# Altium PCB PCB1.PcbDoc
Units mm, origin at the board's own origin, x right, y up, seen from the top; angles counter-clockwise.
Board outline 152.4 x 101.6 mm, 2 copper layers (Top Layer, Bottom Layer); 16 components, 11 nets, 42 pads, 6 vias.
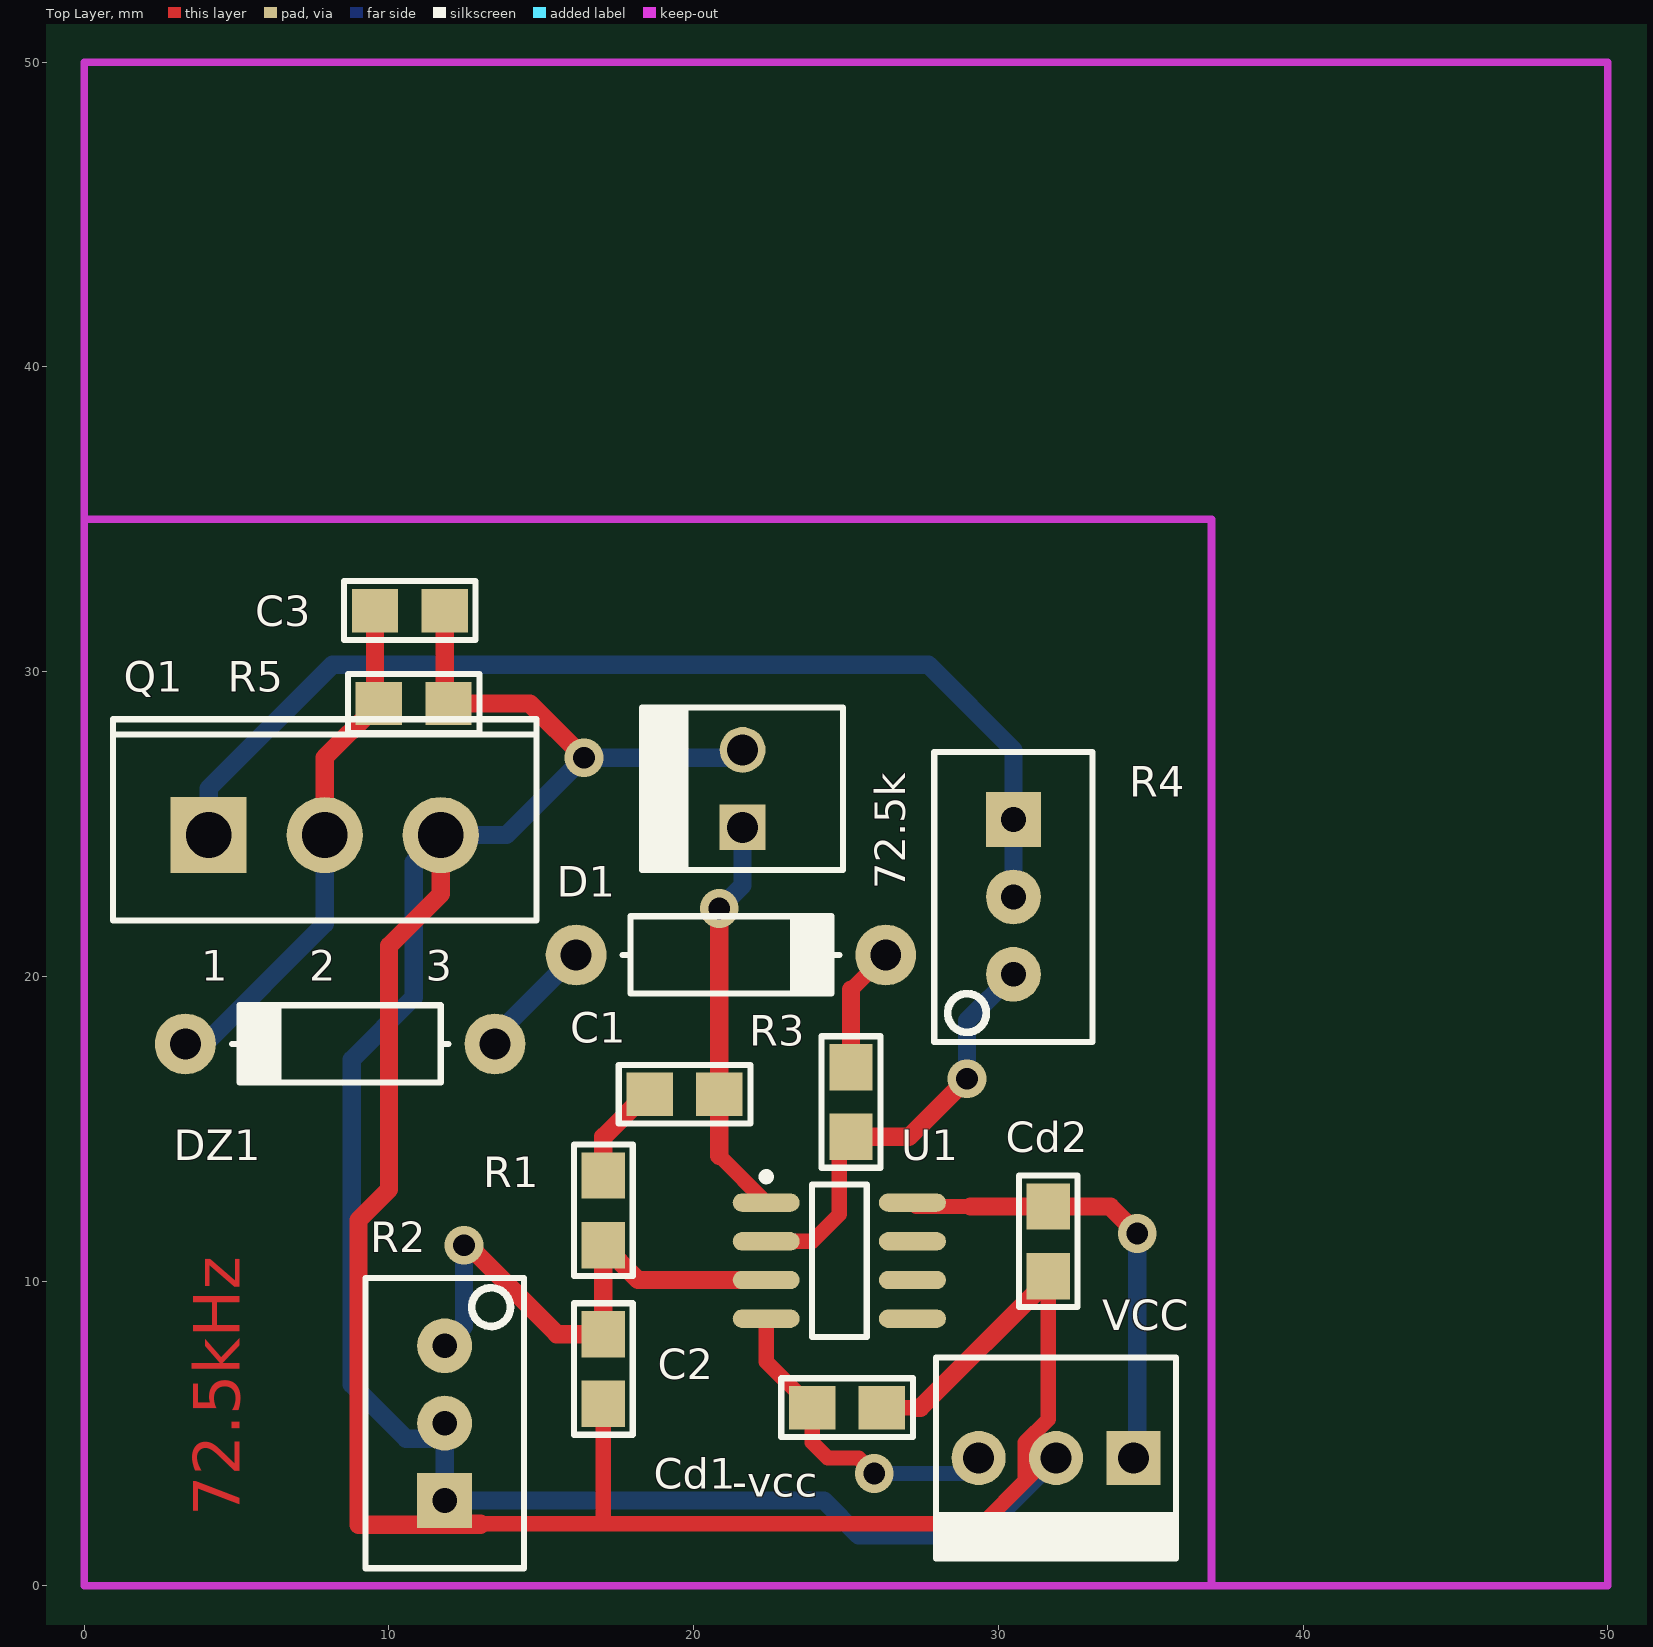
[diagram p0: Top Layer view]
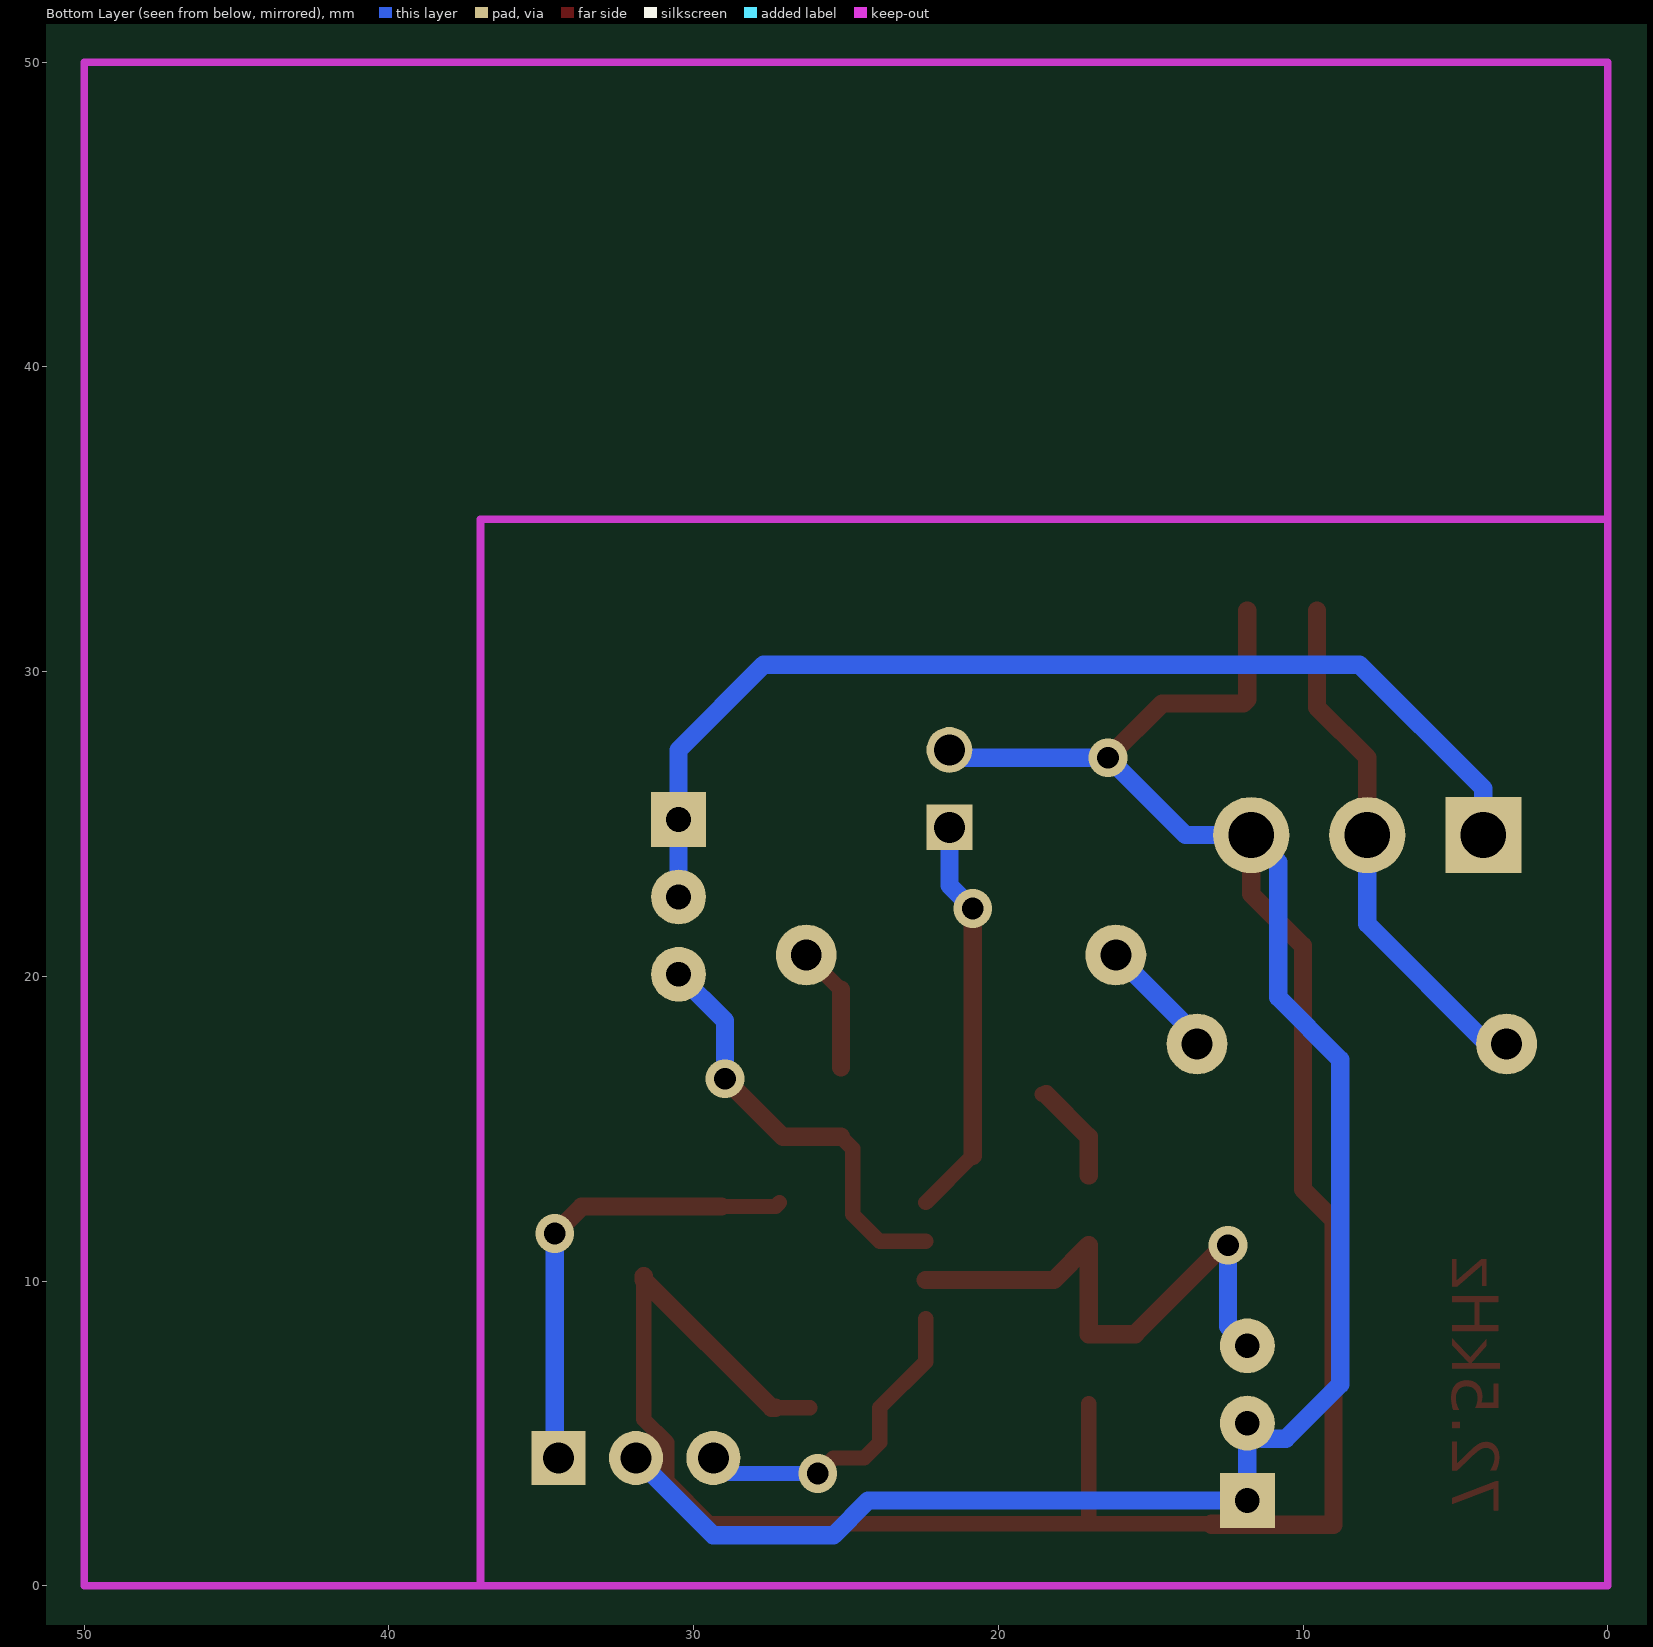
[diagram p1: Bottom Layer view, seen from below]
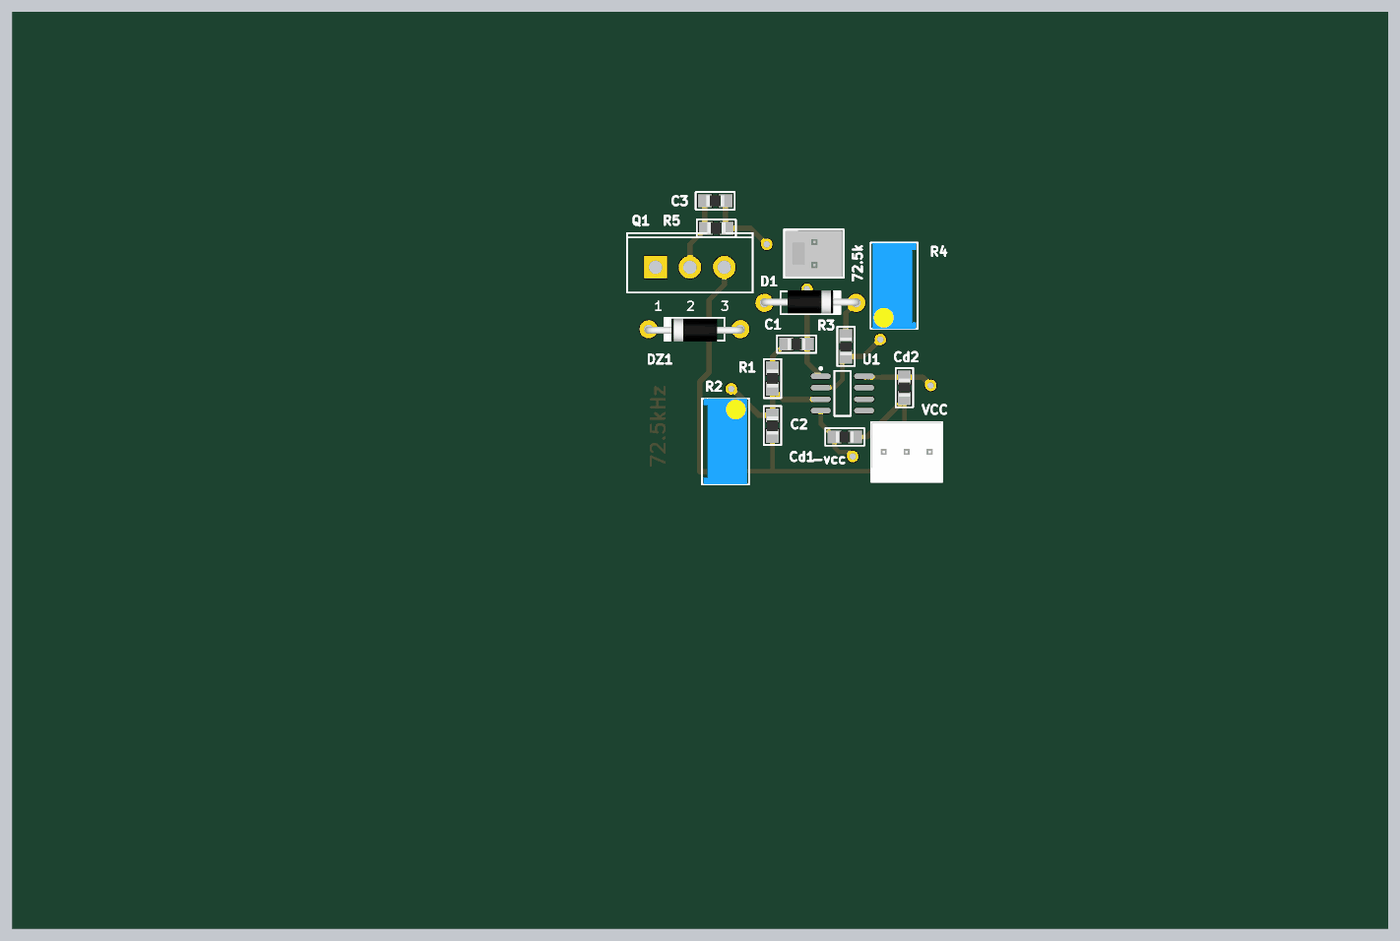
[diagram p2: 3D render of the assembled board from above, using the file's embedded part models]

## Layer stack, top to bottom
Top Solder: solder mask 0.0102, Solder Resist, Dk 3.5
Top Layer: signal copper 0.0356
Dielectric 1: dielectric 0.32, FR-4, Dk 4.8
Bottom Layer: signal copper 0.0356
Bottom Solder: solder mask 0.0102, Solder Resist, Dk 3.5

## Board outline
-67.167,-48.641 85.233,-48.641 85.233,52.959 -67.167,52.959

## Design rules (kind name [scope] priority, off if disabled: settings)
Clearance [All] p1: gap=0.254
PolygonConnect [All] p1: connectstyle=Relief reliefconductorwidth=0.254 reliefentries=4 polygonreliefangle="90 Angle" airgapwidth=0.254
RoutingVias [All] p1: holewidth=0.711 width=1.27 viastyle="Through Hole" minholewidth=0.711 minwidth=1.27 maxholewidth=0.711 maxwidth=1.27
SolderMaskExpansion [All] p1: expansion=0.102
Width [All] p1: maxlimit=0.6 minlimit=0.3 preferedwidth=0.5
30 further rules are at their usual default settings.

## Components (designator, comment, footprint, x,y, rotation, side; value= is the part's Value field where it differs from the comment)
72.5k "MOLEX2" MOLEX2 21.606,24.892 r90 top
C1 "CAP" 0805 19.701,16.129 r0 top
C2 "CAP" 0805 17.034,7.112 r270 top
C3 "CAP" 0805 10.684,32.004 r180 top
Cd1 "CAP" 0805 25.035,5.842 r180 top
Cd2 "CAP" 0805 31.639,11.303 r90 top
D1 "DIODO" DO41 21.225,20.701 r0 top
DZ1 "DIODO ZENER" DO41 8.398,17.78 r180 top
Q1 "JFET-N" TO-254-AA 7.89,24.638 r0 top
R1 "RES" 0805 17.034,12.319 r270 top
R2 "PRESET" "PRESET V" 11.827,5.334 r90 top
R3 "RES" 0805 25.162,15.875 r90 top
R4 "PRESET" "PRESET V" 30.496,22.606 r270 top
R5 "RES" 0805 10.811,28.956 r180 top
U1 "TL082CM" M08A_N 24.781,10.668 r0 top
VCC "MOLEX3" MOLEX3 34.433,4.191 r180 top

## Footprints (in the part's own frame and the unit in brackets; to place one, negate y for a bottom-side part, rotate by r counter-clockwise, add the part's x,y. Pads: shape width x height; smd on the part's side, far side on the other; paste and mask are expansions set on the pad)
0805 [mil] "Pasivo 0805"
  rect 60x56 smd: 1(-45,0) 2(45,0)
  silkscreen extent -85,-38 85,38, body extent -40,-24 39,25, height 15
DO41 [mm]
  round 2 hole 1.016: 1(-5.08,0) 2(5.08,0)
  silkscreen extent -3.56,-1.27 3.56,1.27, body extent -5.46,-1.19 5.46,1.37, height 2.03
M08A_N [mm] "SOIC, 8-Leads, Body 4.9x3.9mm, Pitch 1.27mm, IPC Medium Density"
  oval 2.2x0.6 smd: 1(-2.4,1.905) 2(-2.4,0.635) 3(-2.4,-0.635) 4(-2.4,-1.905) 5(2.4,-1.905) 6(2.4,-0.635) 7(2.4,0.635) 8(2.4,1.905)
  silkscreen extent -2.52,-2.5 0.9,2.88, body extent -2,-2.5 2,2.5, height 1.75
MOLEX2 [mm]
  rect 1.5x1.5 hole 1.016: 1(0,0)
  round 1.5 hole 1.016: 2(2.54,0)
  silkscreen extent -1.4,-3.3 3.94,3.3, body extent -1.27,-3.17 3.81,3.18, height 10.74
MOLEX3 [mil]
  rect 70x70 hole 40: 1(0,0)
  round 70 hole 40: 2(100,0) 3(200,0)
  silkscreen extent -55,-130 255,130, body extent -50,-125 250,125, height 423
"PRESET V" [mm]
  rect 1.8x1.8 hole 0.813: 1(-2.54,0)
  round 1.8 hole 0.813: 2(0,0) 3(2.54,0)
  silkscreen extent -4.76,-2.6 4.76,2.6, body extent -4.7,-2.42 4.83,2.42, height 11.55
TO-254-AA [mm] "TO, Thru-Hole, Vertical, Heatsink Mounted; 3 In-Line Leads; Pitch 3.81 mm"
  rect 2.5x2.5 hole 1.5: 1(-3.81,0)
  round 2.5 hole 1.5: 2(0,0) 3(3.81,0)
  silkscreen extent -6.95,-2.8 6.95,3.8

## Part data
Q1: "N-Channel JFET"
U1: "Wide Bandwidth Dual JFET Input Operational Amplifier, 8-pin Narrow SOIC"

## Via types
v1: diameter 1.27, hole 0.711, Top Layer to Bottom Layer, 6 vias

## Nets (pads, with @x,y where several pads share a name; then routed paths per layer and width w, separated by ;. In a path a pad name is that pad's centre, name@x,y a point inside that pad or via, vN(x,y) a via of type N, cw(c..) or ccw(c..) an arc to the next point about the centre after c; other vN are vias at no path point)
-VCC: Cd1.2 U1.4 VCC.3 | length 10.8
  Top Layer w0.5: U1.4 22.381,7.353 Cd1.2 23.892,4.699 24.4,4.191 25.416,4.191 v1(25.924,3.683)
  Bottom Layer w0.5: v1(25.924,3.683) 28.845,3.683 VCC.3
GND: 72.5k.2 C2.2 C3.1 Cd1.1 Cd2.1 Q1.3 R2.1 R2.2 R5.1 VCC.2 | length 134
  Top Layer w0.5: 13,2.032 17.034,2.032 ; C2.2 17.034,2.032 ; Cd1.1 27.321,5.842 ; Cd2.1@31.639,10.033 31.639,5.461 30.877,4.699 30.877,3.429 ; VCC.2 31.639,4.191 30.877,3.429 ; 17.034,2.032 29.48,2.032 30.877,3.429
  Top Layer w0.6: Q1.3 11.7,22.7 10,21 10,13 9,12 9,2 13,2 13,2.032 12.589,2.032 R2.1 ; C3.1 11.827,29.083 R5.1 14.621,28.956 v1(16.399,27.178) ; 27.321,5.842 27.448,5.842 31.639,10.033 Cd2.1
  Bottom Layer w0.6: 72.5k.2 21.352,27.178 v1(16.399,27.178) 13.859,24.638 Q1.3 10.811,23.749 10.811,19.304 8.779,17.272 8.779,6.604 10.557,4.826 11.319,4.826 R2.2 R2.1 24.273,2.794 25.416,1.651 29.353,1.651 VCC.2
Net72.5k_1: 72.5k.1 C1.2 U1.1 | length 13.3
  Top Layer w0.5: 20.844,14.11 U1.1
  Top Layer w0.6: 20.844,14.11 C1.2 v1(20.844,22.225)
  Bottom Layer w0.6: v1(20.844,22.225) 21.606,22.987 72.5k.1
NetC1_1: C1.1 R1.1 | length 3.4
  Top Layer w0.5: C1.1@18.431,16.129 C1.1
  Top Layer w0.6: R1.1 17.034,14.732 C1.1@18.431,16.129
NetC2_1: C2.1 R1.2 R2.3 U1.3 | length 18.3
  Top Layer w0.6: v1(12.462,11.176) 12.589,11.176 15.51,8.255 C2.1 R1.2 18.177,10.033 U1.3
  Bottom Layer w0.5: R2.3 R2.3@11.954,7.747
  Bottom Layer w0.6: R2.3 12.462,8.509 v1(12.462,11.176)
NetC3_2: C3.2 DZ1.2 Q1.2 R5.2 | length 17.2
  Top Layer w0.6: Q1.2 7.89,27.178 9.541,28.829 C3.2
  Bottom Layer w0.6: DZ1.2 3.953,17.78 7.89,21.717 Q1.2
NetD1_1: D1.1 DZ1.1 | length 4
  Bottom Layer w0.6: DZ1.1 13.478,18.034 D1.1
NetD1_2: D1.2 R3.2 | length 4.2
  Top Layer w0.5: 25.162,19.558 D1.2
  Top Layer w0.6: R3.2 25.162,19.558
NetQ1_1: Q1.1 R4.1 R4.2 | length 35.6
  Bottom Layer w0.6: Q1.1 4.08,26.162 8.144,30.226 27.702,30.226 30.496,27.432 R4.1 R4.2
NetR3_1: R3.1 R4.3 U1.2 | length 14.1
  Top Layer w0.5: U1.2 23.892,11.303 24.781,12.192 24.781,14.351 R3.1
  Top Layer w0.6: R3.1 27.067,14.732 v1(28.972,16.637)
  Bottom Layer w0.6: v1(28.972,16.637) 28.972,18.542 R4.3
VCC: Cd2.2 U1.8 VCC.1 | length 15.2
  Top Layer w0.5: U1.8 27.308,12.446 29.099,12.446
  Top Layer w0.6: 29.099,12.446 Cd2.2 33.671,12.446 v1(34.56,11.557)
  Bottom Layer w0.6: VCC.1 34.56,4.318 v1(34.56,11.557)
pads on no net: U1.5 U1.6 U1.7

## Keep-outs
Keep-Out Layer:
  lines w0.254: 0,35 37,35 37,0 ; 0,0 50,0 50,50 0,50 0,0

## Other copper
Top Layer:
  text "72.5kHz" at 5.096,2.286 h1.52 r90

## Silkscreen, mask and mechanical layers (free items; w line width, h text height)
Top Overlay:
  text "-vcc" at 21.272,2.921 h1

## Text inside footprints (layer, text, board x,y; h text height)
Q1: Top Overlay "3" at 11.2,19.863 h1; Top Overlay "2" at 7.39,19.863 h1; Top Overlay "1" at 3.83,19.863 h1